# Altium PCB bithd_razor.PcbDoc
Units mm, origin at the board's own origin, x right, y up, seen from the top; angles counter-clockwise.
Board outline 44.54 x 77.25 mm, 2 copper layers (Top Layer, Bottom Layer); 105 components, 76 nets, 389 pads, 138 vias.
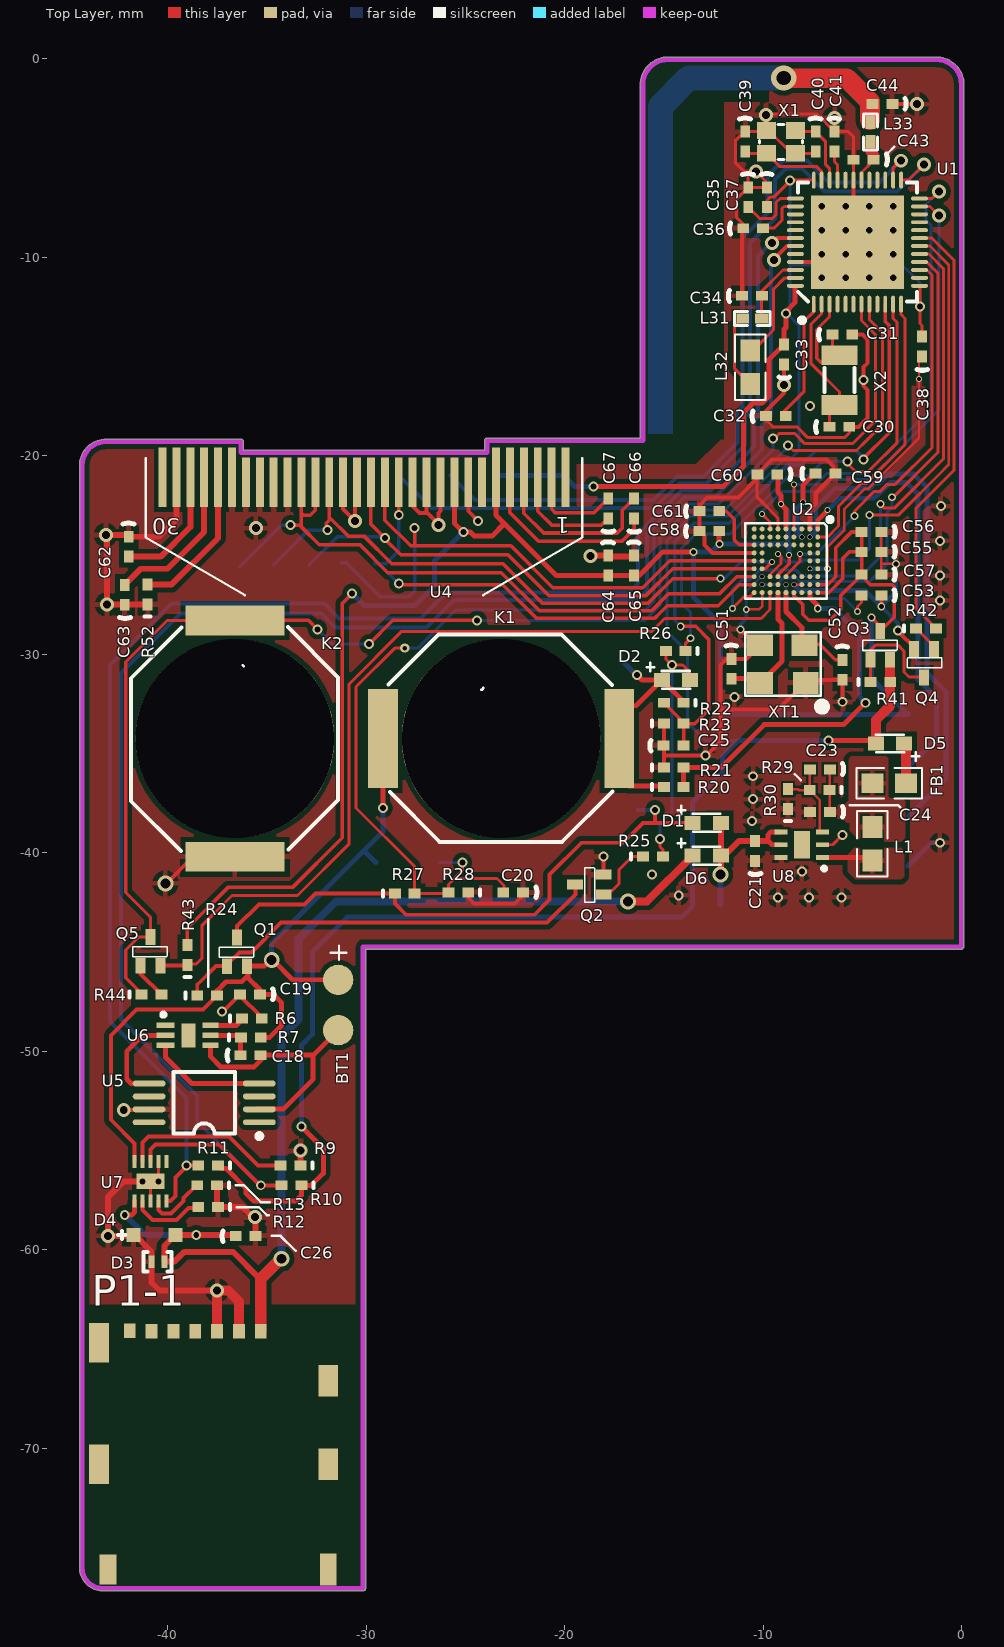
[diagram p0: Top Layer view]
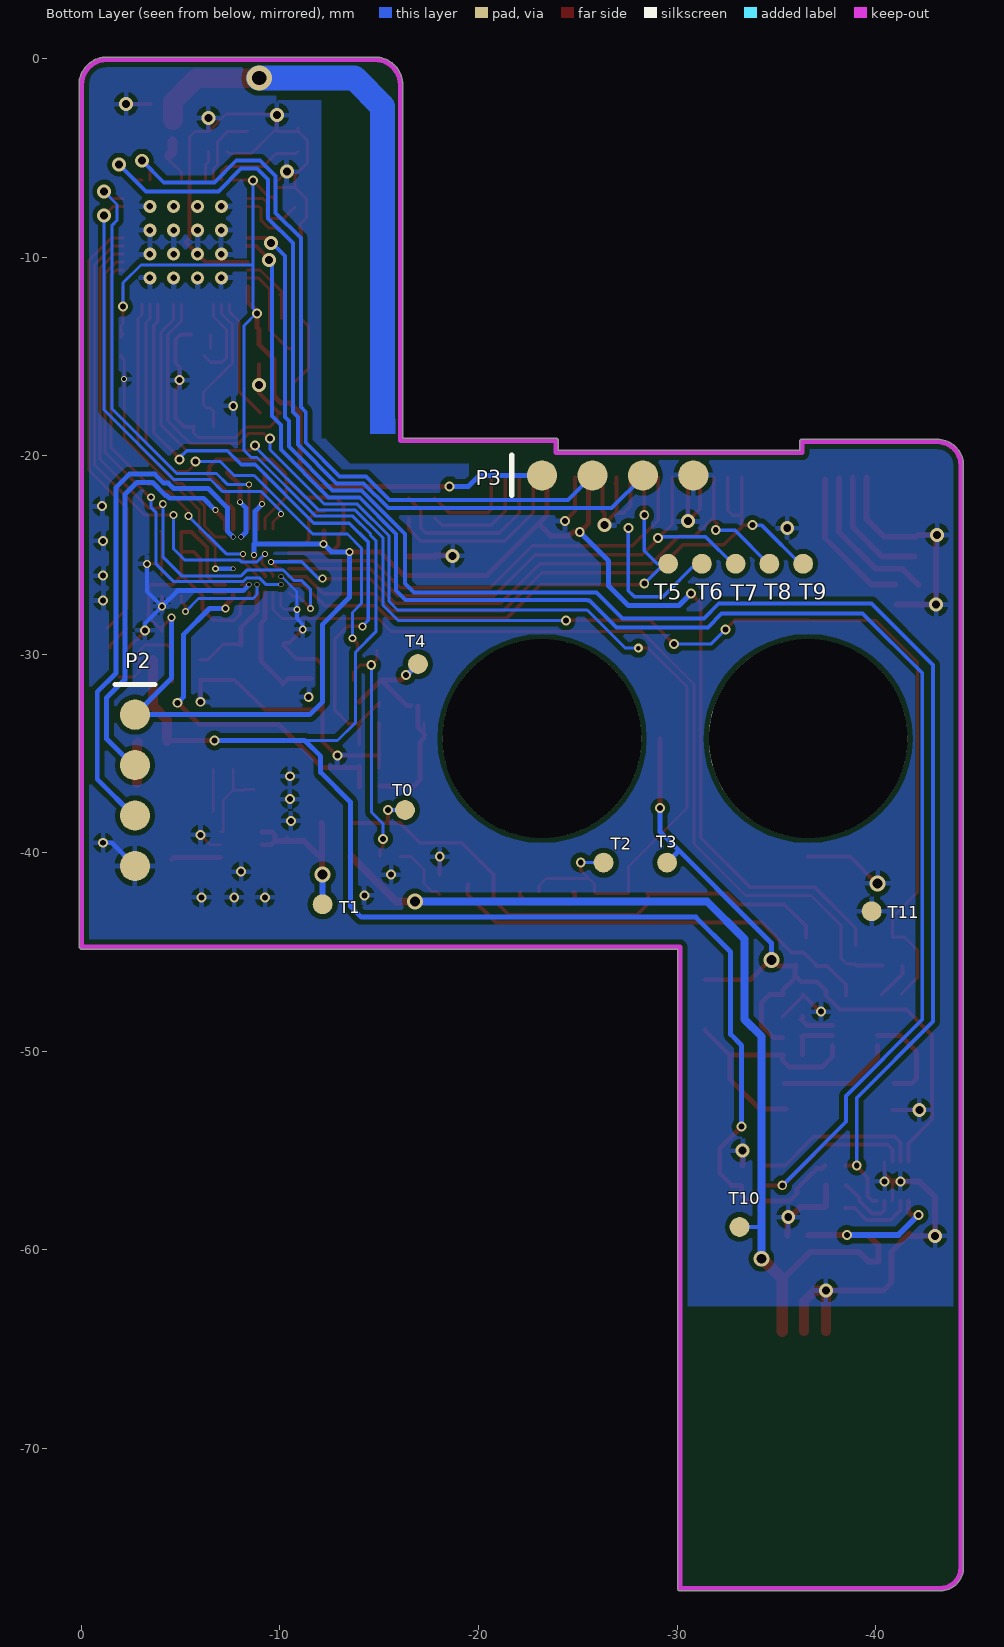
[diagram p1: Bottom Layer view, seen from below]

## Layer stack, top to bottom
Top Layer: signal copper 0.0356
Dielectric: dielectric 0.32, FR-4, Dk 4.8
Bottom Layer: signal copper 0.0356

## Board outline
-44.425,-76 cw(c-44.3,-76) -44.423,-75.975 cw(c-44.3,-75.95) -44.425,-75.95 -44.425,-20.55 cw(c-44.3,-20.55) -44.423,-20.525 cw(c-44.3,-20.5) -44.425,-20.5 cw(c-43.104,-20.5) -43.104,-19.179 -43.031,-19.179 cw(c-43,-19.3) -43,-19.175 -36.3,-19.175 cw(c-36.3,-19.3) -36.175,-19.3 -36.175,-19.725 -24.025,-19.725 -24.025,-19.25 cw(c-23.9,-19.25) -23.9,-19.125 -16.186,-19.125 -16.186,-1.327 cw(c-14.791,-1.327) -14.791,0.068 -1.281,0.068 cw(c-1.281,-1.327) 0.114,-1.327 0.114,-44.711 cw(c-0.011,-44.711) 0.077,-44.8 0.078,-44.8 0.039,-44.839 0.039,-44.838 cw(c-0.05,-44.75) -0.05,-44.875 -30.025,-44.875 -30.025,-77.05 cw(c-30.15,-77.05) -30.025,-77.052 cw(c-30.15,-77.053) -30.025,-77.053 cw(c-30.15,-77.053) -30.15,-77.179 -43.268,-77.179 cw(c-43.268,-77.053) -43.301,-77.174 cw(c-43.25,-76)

## Design rules (kind name [scope] priority, off if disabled: settings)
Clearance [All] p1: gap=0.125
ComponentClearance [All] p1: gap=0.15 collisioncheckmode=3 verticalgap=0.15 showdistances=FALSE
HoleSize [All] p1: absolutevalues=TRUE maxlimit=12 minlimit=0.076 maxpercent=80.000 minpercent=20.000
HoleToHoleClearance [All] p1: gap=0.076 allowstackedmicrovias=TRUE
MinimumSolderMaskSliver [All] p1: minsoldermaskwidth=0.076
PolygonConnect [All] p1: connectstyle=Relief reliefconductorwidth=0.254 reliefentries=4 polygonreliefangle="90 Angle"
RoutingVias [All] p1: holewidth=0.3 width=0.6 viastyle="Through Hole" minholewidth=0.05 minwidth=0.1 maxholewidth=8 maxwidth=9
SilkToSilkClearance [All] p1: silktosilkclearance=0
SilkscreenOverComponentPads [All] p1: minsilkscreentomaskgap=0
SolderMaskExpansion [All] p1: expansion=0.102
Width [All] p1: maxlimit=2.54 minlimit=0.125 preferedwidth=0.25 minimp=50.000000 maximp=50.000000 favimp=50.000000
22 further rules are at their usual default settings.

## Components (designator, comment, footprint, x,y, rotation, side; value= is the part's Value field where it differs from the comment)
BT1 "Battery" BAT_CON -31.4,-46.4 r270 top
C18 "0.1uF" 0402-c -36.7,-50.2 r0 top
C19 "1uF" 0402-c -34.95,-47.15 r180 top
C20 "100nf" 0402-c -21.7,-42 r180 top
C21 "1uF" 0402-c -10.4,-40.8 r90 top
C23 "22pF" 0402-c -6.25,-35.8 r180 top
C24 "10uF" 0402-c -6.25,-37.95 r180 top
C25 "0.1uF" 0402-c -15.4,-34.6 r0 top
C26 "1uF" 0402-c -36.95,-59.3 r0 top
C30 "12pF" 0402-c -7.05,-18.55 r0 top
C31 "12pF" 0402-c -6.9,-13.9 r0 top
C32 "100nF" 0402-c -10.25,-18 r0 top
C33 "100nF" 0402-c -8.95,-15.8 r90 top
C34 "1uF" 0402-c -11.45,-11.95 r0 top
C35 "12pF" 0402-c -10.75,-6.1 r270 top
C36 "12pF" 0402-c -11.389,-8.55 r0 top
C37 "100nF" 0402-c -9.8,-6.1 r270 top
C38 "100nF" 0402-c -2,-15.4 r90 top
C39 "12pF" 0402-c -10.9,-3.3 r270 top
C40 "12pF" 0402-c -7.35,-3.3 r270 top
C41 "100pF" 0402-c -6.4,-3.3 r270 top
C43 "0.8pF" 0402-c -4.05,-5.1 r180 top
C44 "1.2pF" 0402-c -3.1,-2.3 r180 top
C51 "22pF" 0402-c -11.6,-29.85 r270 top
C52 "22pF" 0402-c -6,-29.9 r270 top
C53 "1uf" 0402-c -3.65,-27.05 r180 top
C55 "0.1uf" 0402-c -3.65,-24.85 r180 top
C56 "0.1uf" 0402-c -3.65,-23.85 r180 top
C57 "0.1uf" 0402-c -3.65,-26 r180 top
C58 "0.1uf" 0402-c -13.6,-23.8 r0 top
C59 "2.2uF" 0402-c -7.75,-20.9 r0 top
C60 "0.1uf" 0402-c -8.9,-20.95 r180 top
C61 "2.2uF" 0402-c -13.6,-22.8 r0 top
C62 "2.2uF" 0402-c -41.95,-23.7 r270 top
C63 "4.7uF" 0402-c -42.15,-27.9 r90 top
C64 "1uF" 0402-c -17.8,-24.65 r270 top
C65 "1uF" 0402-c -16.5,-24.65 r270 top
C66 "1uF" 0402-c -16.5,-23.55 r90 top
C67 "1uF" 0402-c -17.8,-23.55 r90 top
D1 "IN5819" SOD523 -13.55,-38.5 r0 top
D2 "IN5819" SOD523 -15.1,-31.3 r0 top
D3 "PESD5V0S1BL" SOD882 -40.8,-60.6 r0 top
D4 "PZU5.6B" SOD323 -39.6,-59.25 r180 top
D5 "IN5819" SOD523 -2.9,-34.5 r180 top
D6 "IN5819" SOD523 -13.55,-40.15 r0 top
FB1 "WLCB1005D" 0603-1 -3.65,-36.5 r0 top
K1 "ON/OFF" SMALL_KEY -23.2,-34.25 r0 top locked
K2 "ON/OFF" SMALL_KEY -36.6,-34.25 r90 top locked
L1 "2.2uH" 0603-1 -4.5,-39.55 r270 top
L31 "15nH" INDC1005X04L -10.55,-13.1 r180 top
L32 "10uH" 0603-1 -10.65,-15.55 r90 top
L33 "3.9nH" INDC1005X04L -4.6,-3.7 r90 top
P1-1 "NanoSim" NANOSIM1 -37.7,-63.7 r0 top
P2 "DownLoad_STM32" SWD_CON -2.7,-33.05 r270 bottom
P3 "DownLoad_Nodic" SWD_CON -23.2,-21 r180 bottom
Q1 "NTA4151PT1G" SOT523_MOSFET -36.5,-44.25 r0 top
Q2 "2SK3019TL" SOT523_MOSFET -19.5,-41.6 r90 top
Q3 "NTA4151PT1G" SOT523_MOSFET -4.1,-28.8 r0 top
Q4 "2SK3019TL" SOT523_MOSFET -1.9,-31.2 r180 top
Q5 "3906" SOT523 -40.85,-44.35 r0 top
R6 "2k" 0402-A -35.75,-48.35 r0 top
R7 "100" 0402-A -35.8,-49.3 r0 top
R9 "10K" 0402-A -33.8,-55.75 r180 top
R10 "10K" 0402-A -33.75,-56.75 r180 top
R11 "10K" 0402-A -37.95,-55.75 r180 top
R12 "18K" 0402-A -37.95,-57.85 r180 top
R13 "3.83K" 0402-A -38,-56.75 r180 top
R20 "2K" 0402-A -14.5,-36.7 r0 top
R21 "2K" 0402-A -14.5,-35.7 r0 top
R22 "2K" 0402-A -14.5,-32.45 r180 top
R23 "10K" 0402-A -14.5,-33.5 r0 top
R24 "1M" 0402-A -38,-47.2 r0 top
R25 "150K" 0402-A -15.55,-40.2 r0 top
R26 "150K" 0402-A -14.4,-29.85 r180 top
R27 "3M" 0402-A -28.05,-42.05 r0 top
R28 "1M" 0402-A -25.35,-42 r180 top
R29 "665K" 0402-A -7.15,-36.85 r180 top
R30 "160K" 0402-A -8.75,-37.3 r90 top
R41 "1M" 0402-A -4.1,-31.4 r0 top
R42 "100K" 0402-A -1.8,-28.7 r0 top
R43 "1M" 0402-A -39,-45.15 r90 top
R44 "10K" 0402-A -40.8,-47.15 r0 top
R52 "390K" 0402-A -41,-27 r90 top
T0 "Test" TEST_P#1 -16.3,-37.85 r0 top
T1 "Test" TEST_P#1 -12.15,-42.6 r0 top
T2 "Test" TEST_P#2 -26.3,-40.45 r0 top
T3 "Test" TEST_P#1 -29.5,-40.5 r0 top
T4 "Test" TEST_P#1 -16.95,-30.5 r0 top
T5 "Test" TEST_P#1 -29.55,-25.45 r0 top
T6 "Test" TEST_P#1 -31.25,-25.45 r0 top
T7 "Test" TEST_P#3 -32.85,-25.45 r0 top
T8 "Test" TEST_P#4 -34.6,-25.55 r0 top
T9 "Test" TEST_P#1 -36.35,-25.45 r0 top
T10 "Test" TEST_P#1 -33.15,-58.85 r90 top
T11 "Test" TEST_P#1 -39.8,-42.95 r90 top
U1 "nRF52832-QFAAB0" QFN40P600X600X90-48N -5.25,-9.25 r90 top
U2 "STM32F205REY6" WLCSP64 -6.85,-23.3 r270 top
U4 "Oled12864" OLED12864_Mod -30.1,-21.25 r180 top
U5 "FS8205A" TSSOP-8 -38.15,-52.6 r180 top
U6 "HY2113" DFN-6L -38.95,-49.2 r270 top
U7 "bq24040" WSON-10 -41.65,-57.25 r90 top
U8 "TPS62260DRV" SON-6 -7,-40.25 r180 top
X1 "32MHz" BT-XTAL_2016 -9.1,-4.2 r180 top
X2 "32.768kHz" XTAL_3215 -6.15,-16.2 r90 top
XT1 "8Mhz" SMD3225 -10.15,-31.45 r0 top

## Footprints (in the part's own frame and the unit in brackets; to place one, negate y for a bottom-side part, rotate by r counter-clockwise, add the part's x,y. Pads: shape width x height; smd on the part's side, far side on the other; paste and mask are expansions set on the pad)
0402-A [mm] "Chip Inductor; Body 1 x 0.5 mm (LxW typ)"
  rect 0.6x0.5 smd: 1(-0.5,0) 2(0.5,0)
  silkscreen extent -1.1,-0.15 -1.1,0.15
0402-c [mm]
  rect 0.6x0.5 smd: 1(0.389,0) 2(1.389,0)
  silkscreen extent -0.3,-0.28 -0.25,0.25
0603-1 [mm] "贴片带丝印"
  rect 1.1x1 smd: 1(-0.85,0) 2(0.85,0)
  silkscreen extent -1.65,-0.76 1.65,0.76, body extent -1.14,-0.38 1.14,0.38, height 1
BAT_CON [mil]
  round 60 smd: 1(0,0) 2(100,0)
  silkscreen extent -67,-15 -39,16
BT-XTAL_2016 [mm] "Crystal 2.0 x 1.6 mm"
  rect 0.95x0.85 smd: 1(-0.725,-0.575) 2(0.725,-0.575) 3(0.725,0.575) 4(-0.725,0.575)
  silkscreen extent -1.08,-0.88 1.08,0.88, body extent -1.05,-0.85 1.05,0.85, height 0.56
DFN-6L [mm]
  rect 0.28x0.9 smd mask+0.05: 1(-0.5,-1.15) 2(0,-1.15) 3(0.5,-1.15)
  rect 0.28x0.8 smd mask+0.05: 4(0.5,1.11) 5(0,1.11)
  rect 0.28x0.81 smd mask+0.05: 6(-0.5,1.11)
  rect 1.2x0.7 smd: ""(0,0)
  silkscreen extent -1.15,-1.36 -0.94,-1.15
INDC1005X04L [mm] "Chip Inductor, 2-Leads, Body 1.0x0.5mm, IPC High Density"
  rect 0.65x0.5 smd: 1(-0.475,0) 2(0.475,0)
  silkscreen extent -0.9,-0.35 0.9,0.35, body extent -0.5,-0.3 0.5,0.3, height 0.5
NANOSIM1 [mm]
  rect 0.6x0.75 smd: 1(2.4,-0.4) 2(1.3,-0.4) 3(0.2,-0.4) 4(-0.9,-0.4) 5(-2,-0.4) 6(-3.1,-0.4) 7(-4.2,-0.375)
  rect 1x2 smd: ""(-5.75,-7.1) ""(-5.75,-0.975)
  rect 0.85x1.5 smd: ""(-5.3,-12.4)
  rect 0.85x1.6 smd: ""(5.8,-12.4)
  rect 1x1.6 smd: ""(5.8,-7.1) ""(5.8,-2.9)
OLED12864_Mod [mm]
  rect 0.4x3 smd: 1(-10.15,-0.15) 2(-9.45,-0.15) 3(-8.75,-0.15) 4(-8.05,-0.15) 5(-7.35,-0.15) 6(-6.65,-0.15) 25(6.65,-0.15) 26(7.35,-0.15) 27(8.05,-0.15) 28(8.75,-0.15) 29(9.45,-0.15) 30(10.15,-0.15)
  rect 0.4x2.5 smd: 7(-5.95,0.1) 8(-5.25,0.1) 9(-4.55,0.1) 10(-3.85,0.1) 11(-3.15,0.1) 12(-2.45,0.1) 13(-1.75,0.1) 14(-1.05,0.1) 15(-0.35,0.1) 16(0.35,0.1) 17(1.05,0.1) 18(1.75,0.1) 19(2.45,0.1) 20(3.15,0.1) 21(3.85,0.1) 22(4.55,0.1) 23(5.25,0.1) 24(5.95,0.1)
  silkscreen extent -11,-1.13 11,5.77
QFN40P600X600X90-48N [mm] "QFN, 48-Leads, Body 6,0x6,0mm (max), Pitch 0,40mm, IPC Medium Density"
  oval 0.85x0.2 smd: 1(-3.125,2.2) 2(-3.125,1.8) 3(-3.125,1.4) 4(-3.125,1) 5(-3.125,0.6) 6(-3.125,0.2) 7(-3.125,-0.2) 8(-3.125,-0.6) 9(-3.125,-1) 10(-3.125,-1.4) 11(-3.125,-1.8) 12(-3.125,-2.2) 25(3.125,-2.2) 26(3.125,-1.8) 27(3.125,-1.4) 28(3.125,-1) 29(3.125,-0.6) 30(3.125,-0.2) 31(3.125,0.2) 32(3.125,0.6) 33(3.125,1) 34(3.125,1.4) 35(3.125,1.8) 36(3.125,2.2)
  oval 0.2x0.85 smd: 13(-2.2,-3.125) 14(-1.8,-3.125) 15(-1.4,-3.125) 16(-1,-3.125) 17(-0.6,-3.125) 18(-0.2,-3.125) 19(0.2,-3.125) 20(0.6,-3.125) 21(1,-3.125) 22(1.4,-3.125) 23(1.8,-3.125) 24(2.2,-3.125) 37(2.2,3.125) 38(1.8,3.125) 39(1.4,3.125) 40(1,3.125) 41(0.6,3.125) 42(0.2,3.125) 43(-0.2,3.125) 44(-0.6,3.125) 45(-1,3.125) 46(-1.4,3.125) 47(-1.8,3.125) 48(-2.2,3.125)
  rect 4.7x4.7 smd: 49(0,0)
  silkscreen extent -4.06,-3 3,3, body extent -3.02,-3.02 3.02,3.02, height 0.86
SMALL_KEY [mm]
  rect 1.5x5 smd: 1(-5.95,0) 2(5.95,0)
  round 10 hole 10 unplated: ""(0,0)
  silkscreen extent -5.67,-5.2 5.61,5.24
SMD3225 [mm]
  rect 1.3x1.1 smd: 1(0,0) 2(2.3,0) 3(2.23,1.9) 4(0,1.9)
  silkscreen extent -0.76,-1.32 3.24,2.54
SOD323 [mm]
  rect 0.7x0.7 smd: 1(2.1,0) 2(0,0)
  silkscreen extent 2.5,-0.2 2.9,0.2
SOD523 [mm]
  rect 0.8x0.7 smd: 1(0,0) 2(1.42,0)
  silkscreen extent -0.76,-0.45 1.42,0.86
SOD882 [mm]
  rect 0.3x0.65 smd: 1(0,0) 2(0.65,0)
  silkscreen extent -0.4,-0.5 1,0.5
SON-6 [mm]
  rect 0.65x0.25 smd: 1(0,0) 2(0,-0.65) 3(0,-1.3) 4(2.1,-1.3) 5(2.1,-0.65) 6(2.1,0)
  rect 0.8x1.4 smd: ""(1.05,-0.65)
  silkscreen extent -0.14,0.48 0,0.62
SOT523 [mm]
  rect 0.5x0.8 smd: 1(-0.5,-1.34) 2(0.5,-1.34) 3(0,0.1)
  silkscreen extent -0.89,-0.89 0.85,-0.38
SOT523_MOSFET [mm]
  rect 0.5x0.8 smd: 1(-0.5,-1.467) 2(0,-0.027) 3(0.5,-1.467)
  silkscreen extent -0.89,-1.02 0.85,-0.51
SWD_CON [mil]
  round 60 smd: 1(0,0) 2(100,0) 3(200,0) 4(300,0)
  silkscreen extent -60,-40 -60,40
TEST_P#1 [mm]
  round 1 smd far side: 1(0,0)
TEST_P#2 [mm]
  round 1 smd far side: 1(0,-0.05)
TEST_P#3 [mm]
  round 1 smd far side: 1(-0.1,0)
TEST_P#4 [mm]
  round 1 smd far side: 1(-0.05,0.1)
TSSOP-8 [mm]
  oval 1.65x0.3 smd: 1(-2.775,0.975) 2(-2.775,0.325) 3(-2.775,-0.325) 4(-2.775,-0.975) 5(2.775,-0.975) 6(2.775,-0.325) 7(2.775,0.325) 8(2.775,0.975)
  silkscreen extent -2.9,-1.55 1.55,1.8
WLCSP64 [mm]
  round 0.25 smd mask+0.02: A1(0.4,-0.4) A2(0.8,-0.4) A3(1.2,-0.4) A4(1.6,-0.4) A5(2,-0.4) A6(2.4,-0.4) A7(2.8,-0.4) A8(3.2,-0.4) A9(3.6,-0.4) B1(0.4,-0.8) B2(0.8,-0.8) B3(1.2,-0.8) B4(1.6,-0.8) B5(2,-0.8) B6(2.4,-0.8) B7(2.8,-0.8) B8(3.2,-0.8) B9(3.6,-0.8) C1(0.4,-1.2) C2(0.8,-1.2) C3(1.2,-1.2) C7(2.8,-1.2) C8(3.2,-1.2) C9(3.6,-1.2) D1(0.4,-1.6) D2(0.8,-1.6) D3(1.2,-1.6) D7(2.8,-1.6) D8(3.2,-1.6) D9(3.6,-1.6) E1(0.4,-2) E2(0.8,-2) E3(1.2,-2) E7(2.8,-2) E8(3.2,-2) E9(3.6,-2) F1(0.4,-2.4) F2(0.8,-2.4) F3(1.2,-2.4) F7(2.8,-2.4) F8(3.2,-2.4) F9(3.6,-2.4) G1(0.4,-2.8) G2(0.8,-2.8) G3(1.2,-2.8) G7(2.8,-2.8) G8(3.2,-2.8) G9(3.6,-2.8) H1(0.4,-3.2) H2(0.8,-3.2) H3(1.2,-3.2) H4(1.6,-3.2) H5(2,-3.2) H6(2.4,-3.2) H7(2.8,-3.2) H8(3.2,-3.2) H9(3.6,-3.2) J1(0.4,-3.6) J2(0.8,-3.6) J3(1.2,-3.6) J4(1.6,-3.6) J5(2,-3.6) J6(2.4,-3.6) J7(2.8,-3.6) J8(3.2,-3.6) J9(3.6,-3.6)
  silkscreen extent -0.19,-4.04 3.9,0.33
WSON-10 [mm]
  rect 0.65x0.2 smd mask+0.05: 1(-0.3,0) 2(-0.3,-0.4) 3(-0.3,-0.8) 4(-0.3,-1.2) 5(-0.3,-1.6) 6(1.7,-1.6) 7(1.7,-1.2) 8(1.7,-0.8) 9(1.7,-0.4) 10(1.7,0)
  rect 0.8x1.4 smd mask+0.05: 11(0.7,-0.8)
  round 0.3 on Top Overlay: ""(-0.4,0.4)
XTAL_3215 [mm] "XTAL SMD 3.2 x 1.5 mm"
  rect 1x1.8 smd: 1(-1.25,0) 2(1.25,0)
  silkscreen extent -0.6,-0.75 0.6,0.75, body extent -1.6,-0.75 1.6,0.75, height 0.81

## Part data
BT1: "备份电池"
C18 C19 C20 C21 C23 C24 C25 C26 C51 C52 C59 C61 C62 C63 C64 C65 C66 C67: library part Cap, "无极性电容"
C30 C31 C35 C36 C39 C40: library part C0402-12p, "Capacitor, NP0, ?%"
C32 C33 C37 C38: library part C0402-100n, "Capacitor, X7R, ?0%"
C34: library part C0603-1?, "Capacitor, X7R, ?0%"
C41: library part C0402-100p, "Capacitor, NP0, ?%"
C43: library part C0402-0.8p, "Capacitor, NP0, ?%"
C44: library part C0402-1.2p, "Capacitor, NP0, ?.1pF"
C53 C55 C56 C57 C58 C60: "Capacitor, X7R, ?0%"
D1 D2 D5 D6: library part D-Schottky, "肖特基二极管"
D3: library part TVS_DIOCODE, "TVS"
D4: library part D-Schottky, "齐纳二极管"
FB1: library part Inductor, "magnetic bead"
K1 K2: library part KEY
L1: library part Inductor, "inductance"
L31: library part L0402-15n, "Inductor, 320mA, ?%"
L32: library part L0603-10?, "Inductor, 80mA, ?0%"
L33: library part L0402-3n9, "Inductor, 170mA, ?.1nH"
P2 P3: library part "Header 4", "Header, 4-Pin"
Q1 Q3: library part MOSFET-P, "P-Channel MOSFET"
Q2 Q4: library part MOSFET-N, "N-Channel MOSFET"
Q5: library part 2N3906, "PNP General Purpose Amplifier"
R6 R7 R9 R10 R11 R12 R13 R20 R21 R22 R23 R24 R25 R26 R27 R28 R29 R30 R41 R42 R43 R44 R52: library part R-10K, "resistor"
T0 T1 T2 T3 T4 T5 T6 T7 T8 T9 T10 T11: library part CHECK, "测试点"
U1: "Multi-protocol Bluetooth Low Energy, ANT and 2.4GHz proprietary system-on-chip"
U5: "Charger IC"
U6: "Charger"
U7: "Charge"
X1: library part XTAL_SMD2016_32MHz_8pF_Epson, "XTAL SMD 2016, 32MHz, Cl=8pF, Tol: ?0ppm, Stab: ?0ppm"
X2: library part "XTAL_FC-135 32.768k", "XTAL SMD 3215, 32.768kHz, 9pF, ?0ppm"
XT1: library part XT, "晶振"

## Via types
v1: diameter 0.5, hole 0.3, Top Layer to Bottom Layer, 58 vias
v2: diameter 0.7, hole 0.4, Top Layer to Bottom Layer, 22 vias
v3: diameter 0.66, hole 0.33, Top Layer to Bottom Layer, 16 vias
v4: diameter 0.4, hole 0.25, Top Layer to Bottom Layer, 14 vias
v5: diameter 0.3, hole 0.2, Top Layer to Bottom Layer, 10 vias
v6: diameter 0.25, hole 0.2, Top Layer to Bottom Layer, 7 vias
v7: diameter 0.8, hole 0.5, Top Layer to Bottom Layer, 5 vias
v8: diameter 0.35, hole 0.2, Top Layer to Bottom Layer, 4 vias
v9: diameter 1.27, hole 0.711, Top Layer to Bottom Layer, 1 vias
v10: diameter 0.457, hole 0.229, Top Layer to Bottom Layer, 1 vias

## Nets (pads, with @x,y where several pads share a name; then routed paths per layer and width w, separated by ;. In a path a pad name is that pad's centre, name@x,y a point inside that pad or via, vN(x,y) a via of type N, cw(c..) or ccw(c..) an arc to the next point about the centre after c; other vN are vias at no path point)
+2.8V: C33.2 C37.2 C38.2 D5.2 P3.1 Q3.3 R10.1 R11.1 R41.2 U1.13 U1.36 U1.48 | length 132
  Top Layer w0.15: C37.2 -9.8,-7.15 -9.639,-6.989 -9.467,-6.989 v1@-8.639,-6.161 ; C33.2@-8.961,-14.411 C33.2 ; C33.2@-8.95,-14.45 C33.2 ; C33.2@-8.95,-14.4 C33.2 ; v1@-8.603,-6.125 U1.36 ; U1.48@-8.375,-11.5 U1.48 ; Q3.3@-3.6,-30.3 Q3.3 Q3.3@-3.6,-30.2 ; C38.2@-2.125,-13.886 C38.2 ; U1.13@-2.1,-11.45 v1(-2.1,-12.5) -2.1,-13.35 -2,-13.45 C38.2 ; C38.2@-2,-14.05 C38.2
  Top Layer w0.25: R11.1 -37.3,-55.9 -37.05,-55.9 -36.05,-56.9 -36.05,-57.15 -35.65,-57.55 -33.55,-57.55 -33.25,-57.25 R10.1 -32.75,-56.75 -32.15,-56.15 -32.15,-54.9 v1(-33.25,-53.8) ; v1(-18.55,-21.55) -12,-21.55 -11,-20.55 -11,-17.85 -10.5,-17.35 -10.05,-17.35 -9.7,-17 -9.7,-15.15 -8.961,-14.411 -8.95,-14.4 -8.95,-13.65 -8.85,-13.55 v1(-8.85,-12.85) -8.85,-12.75 -8.4,-12.3 U1.48@-8.4,-11.5 ; v1(-6.7,-34.35) -4.35,-34.35 -4.32,-34.38 D5.2@-4.3,-34.4
  Top Layer w0.5: D5.2@-4.32,-34.38 -4.32,-33.32 -3.6,-32.6 R41.2 Q3.3@-3.6,-30.3
  Bottom Layer w0.15: -14.55,-24 -14.85,-24.3 -14.85,-28.85 -13.8,-29.9 -13.8,-33.45 -12.9,-34.35 -11.65,-34.35 -11.25,-34.35 ; -14.55,-23.926 -13.674,-23.05 -11.8,-23.05 -8.85,-20.1 -8.55,-20.1 -8.2,-19.75 -8.2,-13.45 v1@-8.825,-12.825 ; v1@-8.85,-12.8 -8.65,-12.6 -8.65,-10.4 ; v1(-8.65,-6.15) -8.65,-10.4 ; v1(-2.1,-12.5) -2.1,-11.3 -3,-10.4 -8.65,-10.4
  Bottom Layer w0.25: v1(-33.25,-53.8) -33.25,-49.7 -32.7,-49.15 -32.7,-45 -30.95,-43.25 -14.1,-43.25 -13.55,-42.7 -13.55,-37.45 -12.05,-35.95 -12.05,-35.15 -11.25,-34.35 v1(-6.7,-34.35) ; P3.1 -20.05,-21 -19.5,-21.55 v1(-18.55,-21.55)
+5V: C26.1 D3.2 D4.2 D6.1 P1-1.1 T10.1 U7.1 | length 58.8
  Top Layer w0.2: D4.2@-39.65,-59.3 D4.2@-39.6,-59.3 ; C26.1@-36.611,-59.25 C26.1
  Top Layer w0.25: v1(-42.15,-58.25) -41.8,-58.25 -41.65,-58.1 U7.1 ; -35.3,-61.4 -35.3,-61.45 -35.25,-61.4
  Top Layer w0.3: C26.1@-36.611,-59.25 D4.2 -39.65,-59.3 -40.15,-59.8 D3.2 -39.65,-60.6 -39.15,-60.1 -36.7,-60.1 -35.4,-61.4 ; -35.3,-61.5 -35.4,-61.4 ; -35.3,-61.4 -35.4,-61.4 ; D6.1@-13.575,-40.225 D6.1@-13.55,-40.2
  Top Layer w0.4: v7(-16.8,-42.45) -15.85,-42.45 D6.1@-13.6,-40.2
  Top Layer w0.6: P1-1.1 -35.3,-61.5 -35.3,-61.45 v7@-34.35,-60.5
  Bottom Layer w0.2: -34.2,-58.85 T10.1
  Bottom Layer w0.3: v1(-42.15,-58.25) -41.15,-59.25 v1(-38.55,-59.25) ; v7@-34.25,-60.55 v7(-34.25,-60.45)
  Bottom Layer w0.4: v7(-34.25,-60.45) -34.25,-49.25 -33.4,-48.4 -33.4,-44.35 -31.5,-42.45 v7@-16.85,-42.45
ADC_VBAT: C20.2 R27.2 R28.2 T2.1 U1.7 | length 59.7
  Top Layer w0.152: v10(-28.05,-29.7) -28.55,-29.7 -30.5,-31.65 -30.5,-37.75 -27.55,-40.7 -27.55,-42 R27.2@-27.5,-42.05 ; R27.2 R27.2@-27.5,-42.05 ; R28.2@-25.9,-42.05 R27.2@-27.5,-42.05 ; R28.2 -25.85,-41.6 -25.55,-41.3 ; v1(-25.15,-40.5) -25.15,-40.9 -25.55,-41.3 ; C20.2@-23.05,-41.95 -23.05,-41.65 -23.4,-41.3 -25.55,-41.3 ; v1(-9.5,-19.15) -9.45,-19.15 -9.2,-18.9 -9.05,-18.9 -9,-18.9 -8.4,-18.9 -7.9,-19.4 -5.5,-19.4 -4.35,-18.25 -4.35,-13.9 -5.05,-13.2 U1.7
  Bottom Layer w0.152: v10(-28.05,-29.7) -27.4,-29.7 -25.474,-27.774 -15.924,-27.774 -15.5,-27.35 -15.5,-24.05 -13.9,-22.45 -12.25,-22.45 -9.5,-19.7 v1(-9.5,-19.15) ; T2.1 v1@-25.2,-40.5
ANT: C44.2 L33.2 | length 28.2
  Top Layer w1: v9@-8.7,-1 -5.79,-1 -4.61,-2.18 L33.2@-4.61,-3.1
  Bottom Layer w1.27: -15.171,-18.255 -15.171,-2.414 -13.747,-0.99 v9@-8.939,-0.99
  other v9: -8.96,-0.98
CHRG_STA: R10.2 U1.43 U7.8 | length 87.4
  Top Layer w0.2: U7.8 -40.85,-54.95 -40.6,-54.7 -37.4,-54.7 -37.05,-55.05 ; -37.15,-54.95 -35.35,-56.75 R10.2 ; v2@-9.6,-10.25 -8.8,-9.45 U1.43@-8.35,-9.45
  Bottom Layer w0.2: v1(-35.3,-56.75) -38.5,-53.55 -38.5,-52.25 -42.35,-48.4 -42.35,-30.95 -39.35,-27.95 -32.25,-27.95 -31.55,-28.65 -26.95,-28.65 -25.6,-27.3 -25.5,-27.3 ; -25.5,-27.279 -16.329,-27.279 -15.85,-26.8 -15.85,-23.954 -13.996,-22.1 -12.45,-22.1 -12.35,-22 -10.05,-19.7 -10.05,-18.45 -9.6,-18 v2@-9.6,-10.25
  other v2: -9.45,-10.15
CTS: U1.15 U2.E7 | length 19.9
  Top Layer w0.15: U2.E7 -8.85,-26.04 -8.15,-25.34 v5(-8.15,-24.95) ; v4(-5.4,-23.05) -5.4,-22.8 -4.4,-21.8 -4.1,-21.8 -3.75,-21.45 -3.35,-21.45 -1.5,-19.6 -1.5,-10.9 -1.75,-10.65 U1.15
  Bottom Layer w0.15: v5(-8.15,-24.95) -7.3,-24.95 v4(-5.4,-23.05)
CTS_NODIC: U1.16 U2.H8 | length 23.9
  Top Layer w0.15: v4(-3.5,-22.1) -3.45,-22.1 -1.202,-19.852 -1.202,-14.55 ; U1.16 -1.761,-10.25 -1.202,-10.809 -1.202,-14.55 ; -1.202,-14.65 -1.202,-14.55
  Bottom Layer w0.15: v6(-10.05,-26.5) -9.31,-26.5 -8.985,-26.175 -8.315,-26.175 -8.14,-26.35 -4.65,-26.35 -3.75,-25.45 -3.75,-22.85 -3.5,-22.6 v4(-3.5,-22.1)
DEC1: C32.2 U1.1 | length 6.1
  Top Layer w0.152: C32.2@-9.011,-17.85 -7.95,-16.789 -7.95,-13.25 -7.45,-12.75 U1.1
DEC3: C41.2 U1.33 | length 1.5
  Top Layer w0.15: C41.2 -6.4,-5.2 -6.25,-5.35 U1.33
DEC4: C34.2 L31.1 U1.46 | length 4.1
  Top Layer w0.15: C34.2@-10.1,-12 -10.1,-11.75 -9,-10.65 U1.46 -8.875,-10.65 ; L31.1 -10.075,-11.975 C34.2@-10.05,-11.95 ; C34.2@-10.05,-11.85 C34.2@-10.011,-11.889
FUN1: U1.24 U2.D1 | length 23.2
  Top Layer w0.15: U2.D1 -8.45,-22.6 v5(-8.45,-21.45) v5@-8.45,-21.4 ; U1.24 -1.5,-7.05 v2(-1.15,-6.7)
  Bottom Layer w0.15: v5(-8.45,-21.45) -7.35,-21.45 -6.8,-20.9 -4.799,-20.9 -1.55,-17.651 -1.55,-8.4 -1.8,-8.15 -1.8,-7.35 v2(-1.15,-6.7)
FUN2: U1.23 U2.G1 | length 23
  Top Layer w0.15: v5(-10.05,-22.95) -9.65,-23.35 U2.G1 ; U1.23 -1.6,-7.45 v2(-1.15,-7.9)
  Bottom Layer w0.15: v5(-10.05,-22.95) -10.05,-22.8 -9.05,-21.8 -7.1,-21.8 -6.5,-21.2 -4.65,-21.2 -1.15,-17.7 v2(-1.15,-7.9)
FUN3: U1.12 U2.A2 | length 14.1
  Top Layer w0.152: U2.A2 -7.15,-24.1 -6.75,-24.1 -6.2,-23.55 -6.2,-22.55 -5.05,-21.4 -4.8,-21.4 -2.85,-19.45 -2.85,-13.1 -3.05,-12.9 U1.12
GND: C19.2 C20.1 C21.1 C24.2 C25.1 C26.2 C30.2 C31.2 C32.1 C33.1 C34.1 C35.1 C36.1 C37.1 C38.1 C39.1 C40.2 C41.1 C43.2 C44.1 C51.1 C52.2 C53.1 C55.1 C56.1 C57.1 C58.1 C59.2 C60.2 C61.1 C62.1 C63.1 C64.1 C65.1 D3.1 D4.1 K2.1 P1-1.2 P1-1.3 P2.4 P3.4 Q2.3 Q4.3 R6.2 R9.1 R12.1 R13.1 R21.1 R23.1 R28.1 R30.1 R52.1 T11.1 U1.31 U1.45 U1.49 U2.B1 U2.B6 U2.C8 U2.D8 U2.F1 U2.H7 U2.H9 U2.J4 U4.8 U4.10 U4.11 U4.12 U4.16 U4.17 U4.21 U4.22 U4.23 U4.24 U4.25 U4.29 U5.7 U7.3 U7.7 U7.11 U8.2 U8.6 X1.2 X1.4 XT1.2 XT1.4 | length 190
  Top Layer w0.125: v8@-10.85,-27.7 v8(-10.85,-27.75) -10.2,-27.75 -10.05,-27.6 U2.H9 ; v6(-8.45,-26.5) U2.C8 ; v8(-6.75,-25.7) -6.75,-24.6 -5.925,-23.775 -5.925,-22.725 -4.864,-21.664 -4.691,-21.664 -2.15,-19.123 v5(-2.15,-16.15) -2.15,-15.15 C38.1@-2,-15 ; C59.2@-6.4,-20.8 C59.2@-6.35,-20.85 ; C59.2@-6.361,-20.911 C59.2 C59.2@-6.361,-20.85 ; C55.1@-4.05,-24.85 C55.1@-4.039,-24.861 ; C57.1 C55.1@-4.039,-24.861 ; -4,-25.45 v4(-3.3,-25.45) ; C56.1@-4,-23.8 -4.039,-23.839 C56.1 C55.1 C55.1@-4.039,-24.861
  Top Layer w0.15: D4.1@-41.7,-59.35 D4.1 ; U7.3 U7.11 -40.45,-56.15 U7.7 ; R12.1@-37.5,-57.8 R12.1 -36.9,-57.85 ; R13.1 R13.1@-37.45,-56.8 ; C36.1 -11,-8.35 -11.35,-8 -11.35,-7.089 C35.1 ; C39.1@-10.9,-3.5 C39.1@-10.9,-3.65 ; C35.1@-10.75,-6.3 C35.1 ; v2(-10.35,-5.7) -9.8,-6.25 C37.1 C35.1 ; C60.2@-10.3,-20.95 -10.3,-21.15 -10.3,-22.1 -9.25,-23.15 U2.F1 ; C32.1 -9.85,-18.011 -9.85,-18.2 -9.5,-18.55 -8.3,-18.55 -7.75,-19.1 -5.9,-19.1 -5.65,-18.85 -5.65,-18.55 C30.2@-5.65,-18.5 ; v2@-9.85,-2.8 -7.289,-2.8 C41.1 ; C40.2 -7.436,-4.775 X1.4 -8.575,-4.775 -9.725,-3.625 X1.2 -9.889,-3.689 C39.1 C39.1@-10.9,-3.65 ; U8.2 -6.5,-39.6 v1(-6,-39.1) ; v2(-6.4,-3) C41.1 ; U1.31 -5.45,-5.211 -5.439,-5.2 -5.439,-3.961 -5.711,-3.689 C41.1 ; C39.1@-10.9,-3.65 -11.4,-4.15 -11.4,-5.25 -10.75,-5.9 C35.1
  Top Layer w0.2: v2(-42.2,-52.95) U5.7@-40.85,-52.95 ; v7@-40.1,-41.6 -38.7,-40.2 K2.1 ; v1@-37.25,-47.95 -37.15,-47.95 C19.2@-36.35,-47.15 ; C19.2 -36.339,-47.211 R6.2@-35.3,-48.25 ; U4.17@-31.15,-21.1 -31.15,-22.7 v2(-30.55,-23.3) -30.55,-21.1 U4.16@-30.45,-21 ; U4.12@-27.65,-21.1 -27.65,-22.55 -27.3,-22.9 -26.9,-22.9 ; U4.11@-26.95,-21.45 U4.11@-26.9,-21.4 ; U4.11@-26.95,-21.1 -26.95,-22.85 -26.9,-22.9 ; U4.10@-26.25,-21.1 -26.25,-22.8 -26.35,-22.9 -26.35,-23.45 -26.9,-22.9 ; U4.8@-24.85,-21.1 -24.85,-22.8 v1(-24.35,-23.3) ; R28.1@-24.75,-42 R28.1 -24.85,-42.25 -24.55,-42.55 -22.5,-42.55 -22.1,-42.15 -22.1,-42.011 C20.1 ; v1@-18.1,-40.2 -18.033,-40.267 Q2.3 -18.033,-40.467 ; R21.1 -15,-35.1 ; R23.1 -15,-35.1 ; C61.1 -13.211,-22.511 -12.8,-22.1 -11.25,-22.1 C60.2@-10.3,-21.15 ; C61.1@-13.2,-22.8 -13.211,-22.811 C58.1 -12.95,-24.061 -12.95,-24.5 -12.55,-24.9 U2.J4 ; v4(-11.15,-28.75) -10.45,-29.45 XT1.4@-10.2,-29.45 ; C34.1 -11.061,-8.611 C36.1 ; C60.2 C60.2@-10.195,-20.855 ; C60.2@-10.2,-20.85 -9.55,-20.2 -6.8,-20.2 -6.45,-20.55 -6.45,-20.8 C59.2@-6.4,-20.85 ; XT1.4 -10.839,-30.239 C51.1 -11.839,-30.239 -12.15,-30.55 -12.15,-32.8 ; C32.1@-10.011,-17.85 -10,-17.85 -9.95,-17.85 -8.95,-16.85 v2@-8.95,-16.5 ; v2@-9.85,-2.8 -9.825,-2.825 X1.2 ; v2@-9,-16.5 v2(-8.95,-16.45) C33.1 ; U1.45 -6.25,-10.25 U1.49 -5.45,-9.05 U1.31 ; XT1.2@-7.9,-31.45 -9.25,-32.8 -12.15,-32.8 ; XT1.2 -7.7,-31.3 C52.2@-6.05,-31.3 ; C52.2 -6,-32.3 v1@-5.95,-32.35 ; C30.2 -5.65,-18.55 -5.2,-18.55 -4.75,-18.1 -4.75,-16.7 -4.95,-16.5 v1(-4.95,-16.2) -4.95,-15.55 -4.75,-15.35 -4.75,-14.15 -5,-13.9 C31.2 ; v4(-4.05,-27.6) C53.1@-4.05,-27.1 ; C44.1 v2(-2.25,-2.3) ; v1@-3.2,-28.85 Q4.3@-2.359,-29.691 ; C38.1@-2.05,-15.061 C38.1 ; -15,-35.1 v1(-12.9,-35.1) -12.85,-35.1 -12.15,-34.4 -12.15,-34.35 -12.15,-32.8
  Top Layer w0.25: P1-1.3@-37.6,-64.05 P1-1.3@-37.55,-64.1 ; U2.B1 -7.65,-22.7 -7.35,-22.4 -7.35,-21.9 -6.361,-20.911 C59.2@-6.35,-20.9
  Top Layer w0.3: v2(-43,-59.3) -43,-57.35 -42.2,-56.55 v1(-41.25,-56.55) U7.11 ; v2@-42.95,-59.3 -41.75,-59.3 D4.1 ; C63.1 -41.061,-27.511 R52.1@-41.05,-27.5 ; C63.1@-42.05,-27.5 v2(-43.05,-27.5) -43.05,-24.05 v2(-43.1,-24) -42.1,-24 C62.1@-42,-24.1 ; C62.1 -40.439,-24.089 -39.55,-23.2 U4.29@-39.55,-21.2 ; D4.1@-41.7,-59.2 -40.8,-60.1 D3.1 -40.8,-61.65 -40.4,-62.05 v2@-37.55,-62.05 ; -39.55,-22.65 U4.29 ; R12.1@-37.5,-57.8 R13.1 ; R12.1 -36.2,-57.85 -35.561,-58.489 C26.2 ; R9.1 v2(-33.3,-55) ; v2@-18.65,-25.05 -18.639,-25.039 C64.1 ; C64.1@-17.85,-25.05 -17.811,-25.089 C65.1@-16.5,-25.089
  Top Layer w0.5: P1-1.3 v2(-37.5,-62.05) -36.95,-62.05 -36.4,-62.6 P1-1.2
  Bottom Layer w0.125: v8@-10.85,-27.7 -10.85,-26.858 -10.092,-26.1 v6(-10.05,-26.1)
  Bottom Layer w0.2: v4(-11.15,-28.75) -11.15,-28.5 -10.85,-28.2 v8(-10.85,-27.75) ; v4(-3.3,-25.45) -3.3,-26.85 v4(-4.05,-27.6) -3.2,-28.45 v1(-3.2,-28.8)
  Bottom Layer w0.25: v6(-8.45,-26.5) -8.15,-26.8 -5.7,-26.8 -4.85,-26.8 v4(-4.05,-27.6) ; v6(-7.65,-25.7) v8(-6.75,-25.7) ; P2.4 -1.53,-39.5 v1(-1.1,-39.5)
  other v1: -40.45,-56.55 -37.25,-48 -9.25,-42.25 -7.7,-42.25 -6.05,-42.25 -14.25,-42.15 -15.6,-41.1 -8.05,-40.95 -18.05,-40.2 -10.55,-38.4 -10.5,-37.3 -10.5,-36.15 -6,-32.4 -11.45,-32.15 -1.1,-27.3 -1.1,-26.05 -1.1,-24.3 -1.05,-22.55 -7.65,-17.5
  other v2: -35.6,-58.35 -18.7,-25.05 -35.55,-23.65 -26.35,-23.5 -9.85,-2.85
  other v3: -7.05,-11.05 -5.85,-11.05 -4.65,-11.05 -3.45,-11.05 -7.05,-9.85 -5.85,-9.85 -4.65,-9.85 -3.45,-9.85 -7.05,-8.65 -5.85,-8.65 -4.65,-8.65 -3.45,-8.65 -7.05,-7.45 -5.85,-7.45 -4.65,-7.45 -3.45,-7.45
  other v7: -40.1,-41.55
KEY1_NODIC: C25.2 R22.2 R23.2 U1.10 | length 33.8
  Top Layer w0.178: R22.2@-15,-32.6 R22.2@-14.9,-32.6 ; R22.2 -14,-33.45 R23.2 ; v4(-14.15,-28.6) -13.4,-28.6 -12.75,-29.25 -12.75,-32.8 -13.45,-33.5 R23.2 ; C25.2@-14,-34.55 R23.2 ; v1@-4.975,-20.175 -3.65,-18.85 -3.65,-13.45 -3.85,-13.25 U1.10
  Bottom Layer w0.178: v4(-14.15,-28.6) -14.45,-28.3 -14.45,-24.35 -13.5,-23.4 -11.7,-23.4 -8.75,-20.45 -8.05,-20.45 -7.35,-19.75 -5.3,-19.75 -4.95,-20.1 v1(-4.95,-20.2)
KEY2_NODIC: K2.2 Q5.3 R44.1 U1.8 | length 71
  Top Layer w0.152: R44.1 -41.3,-47.1 -42.1,-46.3 -42.1,-44.9 -41.45,-44.25 Q5.3 -40.85,-43.25 -42.1,-42 -42.1,-30.4 -40,-28.3 K2.2@-36.65,-28.3 ; v1(-8.75,-19.5) -8.5,-19.75 -5.3,-19.75 -4.8,-19.25 -4,-18.45 -4,-13.8 -4.65,-13.15 U1.8
  Top Layer w0.178: K2.2 -32.9,-28.3 v1(-32.45,-28.75) ; v1(-29.85,-29.5) -28.65,-28.3 v1(-24.4,-28.3)
  Bottom Layer w0.152: v1(-32.45,-28.75) -31.7,-29.5 v1(-29.85,-29.5) ; v1(-24.4,-28.3) -15.95,-28.3 -15.2,-27.55 -15.2,-24.15 -13.8,-22.75 -11.95,-22.75 -8.75,-19.55 v1(-8.75,-19.5)
KEY_CN: R20.2 R21.2 U2.B9 | length 18.7
  Top Layer w0.25: R20.2 R21.2 ; R21.2@-14,-35.65 R21.2 ; U2.B9 -7.65,-27.15 -7.25,-27.55 v4(-7.25,-27.7) ; v1(-4.85,-32.45) -5.95,-33.55 -9.95,-33.55 -12.1,-35.7 R21.2
  Bottom Layer w0.25: v4(-7.25,-27.7) -6.45,-27.7 -5.15,-29 -5.15,-32.15 v1(-4.85,-32.45)
KEY_OK: Q5.2 R43.1 U2.G9 | length 44.7
  Top Layer w0.15: R43.1@-39,-45.6 -38.55,-45.6 -38.25,-45.3 -38.25,-43.65 -36.75,-42.15 -33.45,-42.15 -30.85,-39.55 -30.85,-31.5 -28.2,-28.85 -15.6,-28.85 -15.025,-28.275 ; -15.05,-28.3 -14.95,-28.2 -10.1,-28.2 -9.65,-27.75 U2.G9
  Top Layer w0.2: Q5.2 -39.04,-45.69 R43.1
MCU_EN: R26.1 U1.11 | length 26
  Top Layer w0.152: R26.1 -13.9,-29.45 v4(-13.65,-29.2) ; v1@-5.85,-20.3 -5.35,-20.8 -4.7,-20.8 -4.55,-20.65 -3.25,-19.35 -3.25,-13.3 -3.45,-13.1 U1.11
  Bottom Layer w0.152: v4(-13.65,-29.2) -13.65,-27.9 -14.1,-27.45 -14.1,-24.65 -13.4,-23.95 -11.65,-23.95 -8.7,-21 -7.7,-21 -7,-20.3 v1@-5.85,-20.3
  other v1: -5.75,-20.3
NetBT1_2: BT1.2 C18.2 U5.2 U6.4 | length 12.9
  Top Layer w0.25: U6.4 -37.84,-50.26 -37.3,-50.8 -35.65,-50.8 -35.3,-50.45 C18.2@-35.3,-50.2 ; U5.2@-35.5,-52.9 -34.15,-52.9 -32.66,-51.41 -32.66,-50.2 ; C18.2@-35.35,-50.2 C18.2 C18.2@-35.3,-50.2 ; BT1.2 -32.66,-50.2 ; C18.2@-35.3,-50.2 -32.66,-50.2
NetC18_1: C18.1 R7.1 U6.5 | length 2.5
  Top Layer w0.25: U6.5 -36.4,-49.2 R7.1@-36.311,-49.289 ; C18.1 -36.311,-49.3 R7.1@-36.311,-49.289 ; R7.1 R7.1@-36.311,-49.289 ; R7.1@-36.3,-49.25 -36.311,-49.261 R7.1@-36.311,-49.289
NetC21_2: C21.2 D1.2 D6.2 T1.1 U8.4 U8.5 | length 8.4
  Top Layer w0.25: -9.75,-39.1 -9.75,-39.4 -9.55,-39.6 U8.5 ; -9.711,-39.061 -9.6,-38.95 U8.4
  Top Layer w0.3: v7@-12.13,-40.98 D6.2 ; D1.2@-12.1,-38.5 -12.13,-38.53 D6.2 ; C21.2 -9.761,-39.411 ; C21.2@-10.4,-39.4 -11.2,-39.4 -11.95,-40.15 D6.2
  Bottom Layer w0.3: T1.1 v7(-12.15,-41.1) v7@-12.15,-41.05
NetC23_1: C23.1 C24.1 FB1.1 L1.1 R29.1 | length 2.2
  Top Layer w0.125: C24.1@-6.65,-37.95 -6.65,-35.811 C23.1
NetC23_2: C23.2 R29.2 R30.2 U8.3 | length 4.6
  Top Layer w0.125: R30.2@-8.7,-36.8 -8.25,-36.8 -8.2,-36.85 R29.2 ; C23.2@-7.65,-35.8 R29.2 ; U8.3 -7.15,-38.95 -7.15,-37.35 R29.2
NetC43_1: C43.1 L33.1 U1.30 | length 2
  Top Layer w0.15: U1.30 -5.05,-5.75 -4.5,-5.2 -4.45,-5.2 C43.1@-4.439,-5.2
  Top Layer w0.5: L33.1 -4.6,-4.7 C43.1@-4.4,-4.9
NetC59_1: C59.1 U2.C2 | length 3.7
  Top Layer w0.25: v5(-8,-22.35) -8,-21.5 C59.1@-7.35,-20.85
  Bottom Layer w0.25: v6(-8.05,-24.1) -8.3,-23.85 -8.3,-22.65 v5(-8,-22.35)
NetC61_2: C61.2 U2.J3 | length 3.1
  Top Layer w0.178: C61.2@-12.261,-22.8 -11.85,-22.8 -11.45,-23.2 -11.45,-24.25 -11.2,-24.5 U2.J3
NetC62_2: C62.2 U4.28 | length 6.2
  Top Layer w0.3: C62.2 -40.339,-25.089 -38.85,-23.6 U4.28
NetC63_2: C63.2 U4.27 | length 7.8
  Top Layer w0.3: C63.2 -41.339,-25.7 -40,-25.7 -38.15,-23.85 U4.27@-38.15,-21.15
NetC66_1: C66.1 U4.5 | length 9.4
  Top Layer w0.178: U4.5 -22.75,-22.875 -21.3,-24.325 -17.125,-24.325 -16.5,-23.7 C66.1
NetC66_2: C66.2 U4.4 | length 9
  Top Layer w0.178: U4.4 -22.05,-22.901 -21.051,-23.9 -17.35,-23.9 -17.1,-23.65 -17.1,-22.761 C66.2
NetC67_1: C67.1 U4.3 | length 5.7
  Top Layer w0.178: U4.3 -21.35,-22.8 -20.65,-23.5 -18.15,-23.5 C67.1@-17.828,-23.178 ; C67.1 -17.817,-23.178 C67.1@-17.828,-23.178 ; C67.1@-17.8,-23.15 C67.1@-17.828,-23.178
NetC67_2: C67.2 U4.2 | length 4.8
  Top Layer w0.178: U4.2 -20.65,-22.7 -20.461,-22.889 -18.539,-22.889 C67.2@-17.8,-22.15
NetD1_1: D1.1 Q1.2 R27.1 T0.1 | length 29.2
  Top Layer w0.2: Q1.2 -36.5,-43.7 -35.4,-42.6 -33.1,-42.6 -32.55,-42.05 R27.1 ; R27.1@-28.5,-42.05 R27.1 ; v1(-15.45,-37.85) -15.45,-38.5 ; D1.1 -15.45,-38.5 ; R27.1 -28.55,-42.55 -27.975,-43.125 -21.525,-43.125 -20.75,-42.35 -20.75,-41.1 -19.15,-39.5 -17.05,-39.5 -16.05,-38.5 -15.45,-38.5
  Bottom Layer w0.2: T0.1 v1(-15.45,-37.85) v1@-15.4,-37.8
NetD2_1: D2.1 K1.2 R20.1 R22.1 T4.1 | length 12.6
  Top Layer w0.15: K1.2 -17.25,-34 K1.2@-17.25,-33.45 ; D2.1 D2.1@-15,-31.4
  Top Layer w0.25: K1.2@-17.3,-34.05 -17.25,-34 -16.95,-33.7 K1.2@-16.95,-32.6 ; K1.2 -17.05,-34.45 -17.05,-36.35 -16.75,-36.65 R20.1@-15.05,-36.65 ; K1.2@-16.6,-32.6 -16.4,-32.6 D2.1 ; v1(-16.35,-31.05) -16.1,-31.3 D2.1 ; R22.1@-14,-32.4 D2.1
  Bottom Layer w0.25: T4.1 v1@-16.4,-31.05
NetD2_2: D2.2 R25.2 R26.2 | length 12.2
  Top Layer w0.15: v1@-15.2,-39.35 -15.2,-39.7 -15.05,-39.85 R25.2 ; R26.2@-14.9,-29.8 R26.2 -14.9,-30.25 v1(-14.6,-30.55) ; v1@-14.55,-30.55 -14.05,-30.55 -13.7,-30.9 D2.2@-13.7,-31.3 ; D2.2@-13.75,-31.3 D2.2
  Bottom Layer w0.15: v1(-15.2,-39.3) -15.2,-38.55 -14.6,-37.95 -14.6,-37.9 v1(-14.6,-30.55)
NetD5_1: D5.1 FB1.2 | length 2.1
  Top Layer w0.5: D5.1@-2.85,-34.45 -2.8,-34.5 FB1.2
NetL1_2: L1.2 U8.1 | length 2.5
  Top Layer w0.25: U8.1 -4.65,-40.25 L1.2@-4.55,-40.35
NetL31_2: L31.2 L32.1 | length 3.8
  Top Layer w0.15: L31.2@-11.05,-13.1 -11.45,-13.5 -11.45,-15.6 L32.1
NetL32_2: L32.2 U1.47 | length 5.1
  Top Layer w0.15: L32.2 L32.2@-10.55,-14.6 ; L32.2@-10.65,-14.6 L32.2@-10.55,-14.6 ; U1.47 -8.905,-11.05 -9.475,-11.62 -9.475,-13.675 -10.4,-14.6 L32.2@-10.55,-14.6
NetQ1_1: Q1.1 Q2.2 R24.1 | length 22
  Top Layer w0.2: R24.1 -38.5,-46.65 -37.55,-45.7 Q1.1@-37,-45.7 ; Q1.1 Q1.1@-37,-45.7 ; Q2.2@-19.486,-41.614 Q2.2 ; Q2.2@-19.45,-41.65 -19.45,-42.1 -20.875,-43.525 -34.275,-43.525 -35.767,-45.017 -36.374,-45.017 -37,-45.643 Q1.1@-37,-45.7
NetQ2_1: Q2.1 R25.1 | length 3.2
  Top Layer w0.15: Q2.1 -17.883,-41.95 -17.65,-41.95 -17.25,-41.55 -17.25,-40.85 -16.6,-40.2 R25.1
NetQ3_1: Q3.1 Q4.2 R41.1 | length 5.7
  Top Layer w0.152: R41.1 Q3.1 -4.6,-30.2 -4.6,-29.8 -4.35,-29.55 -3.2,-29.55 -2.9,-29.85 -2.9,-30.9 -2.65,-31.15 Q4.2@-1.9,-31.15
NetQ4_1: Q4.1 R42.1 | length 1.4
  Top Layer w0.152: R42.1 -1.45,-29.55 Q4.1@-1.45,-29.7
NetQ5_1: Q5.1 R44.2 | length 1.9
  Top Layer w0.2: Q5.1@-41.35,-45.7 -41.35,-46.1 R44.2
NetR6_1: R6.1 U6.6 | length 1.8
  Top Layer w0.25: U6.6 -36.55,-48.7 R6.1@-36.25,-48.4 ; R6.1@-36.35,-48.3 R6.1@-36.3,-48.25
NetR9_2: R9.2 U7.9 | length 8.6
  Top Layer w0.2: U7.9 -41.25,-54.6 -40.95,-54.3 -36.9,-54.3 -36.65,-54.55 -36.6,-54.6 -35.45,-55.75 R9.2
NetR12_2: R12.2 U7.2 | length 3.7
  Top Layer w0.2: U7.2 -41.25,-58 -40.75,-58.5 -39.55,-58.5 -38.95,-57.9 R12.2@-38.45,-57.9
NetR13_2: R13.2 U7.4 | length 3.2
  Top Layer w0.2: U7.4 -40.45,-58 -40.274,-58.175 -39.826,-58.175 -39.2,-57.549 -39.2,-57.4 -38.55,-56.75 R13.2
NetR52_2: R52.2 U4.26 | length 7.5
  Top Layer w0.3: R52.2 -39.8,-26.5 -37.45,-24.15 U4.26@-37.45,-21.2
NetU5_4: U5.4 U6.3 | length 5.9
  Top Layer w0.25: U6.3 -40.1,-50.3 -38.775,-51.625 U5.4
NetU5_5: U5.5 U6.2 | length 4.9
  Top Layer w0.25: U5.5 -41.825,-51.625 -42.05,-51.4 -42.05,-50 -41.25,-49.2 U6.2
OLED_CS: T5.1 U2.J8 U4.13 | length 25.8
  Top Layer w0.178: v1@-28.35,-26.5 -23.119,-26.5 -21.435,-28.183 -15.448,-28.183 -15.214,-27.949 -14.832,-27.567 -12.267,-27.567 -11.2,-26.5 U2.J8 ; v1@-28.35,-22.95 U4.13@-28.35,-21.1
  Bottom Layer w0.178: T5.1 T5.1@-29.55,-25.4 ; T5.1@-29.5,-25.45 T5.1@-29.35,-25.45 ; v1(-28.35,-26.45) T5.1@-29.35,-25.45 ; v1(-28.35,-23) -28.35,-24.8 -29,-25.45 T5.1@-29.35,-25.45
OLED_DC: T7.1 U2.J6 U4.15 | length 28.1
  Top Layer w0.178: U4.15@-29.75,-21.1 -29.75,-23.45 v1(-29.05,-24.15) v1@-29,-24.2 ; v1@-29.05,-24.2 -28.25,-25 -22.85,-25 -20.8,-27.05 -15.9,-27.05 -14.55,-25.7 U2.J6
  Bottom Layer w0.178: T7.1@-32.85,-25.5 -31.45,-24.1 v1@-29.05,-24.1
OLED_RST: T6.1 U2.J5 U4.14 | length 31.3
  Top Layer w0.178: U4.14@-29.05,-21.1 -29.05,-23.25 -27.75,-24.55 -27.55,-24.55 ; v1(-27.55,-23.65) -27.55,-24.55 ; U2.J5 -10.453,-25.297 -14.706,-25.297 -16.058,-26.65 -20.6,-26.65 -22.7,-24.55 -27.55,-24.55
  Bottom Layer w0.178: T6.1@-31.25,-25.4 -31,-25.4 -29.3,-27.1 -27.85,-27.1 -27.55,-26.8 v1(-27.55,-23.65) v1@-27.55,-23.6
OSCIN: C52.1 U2.E9 XT1.3 | length 5.3
  Top Layer w0.178: XT1.3@-8.05,-29.55 XT1.3@-7.95,-29.55 ; XT1.3@-7.9,-29.5 -7.15,-29.5 -6.361,-30.289 C52.1
  Top Layer w0.25: U2.E9 -8.85,-27.85 -8.05,-28.65 XT1.3@-8.05,-29.55
OSCOUT: C51.2 U2.F9 XT1.1 | length 6.6
  Top Layer w0.25: C51.2 -10.411,-31.239 XT1.1@-10.15,-31.5 ; XT1.1 -9.05,-30.35 -9.05,-28.45 -9.25,-28.25 U2.F9
P0.25: C35.2 U1.37 | length 3.4
  Top Layer w0.15: C35.2 -10.189,-8.05 -9.528,-8.05 -9.35,-7.872 -9.35,-7.261 -9.139,-7.05 U1.37
P0.26: C36.2 U1.38 | length 2.4
  Top Layer w0.15: C36.2 -9.45,-8.55 -9.05,-8.15 -9.05,-7.55 -8.95,-7.45 U1.38
PG_STA: R11.2 U1.42 U7.5 | length 80.7
  Top Layer w0.2: U7.5 -39.85,-57.55 -39.6,-57.3 -39.6,-56.35 v1@-39.025,-55.775 ; v1@-39,-55.75 R11.2 ; v2@-9.65,-9.4 v2(-9.55,-9.3) -9.3,-9.05 U1.42
  Bottom Layer w0.2: v1(-39.05,-55.75) -39.05,-52.35 -42.9,-48.5 -42.9,-30.55 -39.8,-27.45 -32.1,-27.45 -31.35,-28.2 -27.25,-28.2 -25.95,-26.9 -16.75,-26.9 -16.3,-26.45 -16.3,-24.1 -16.3,-24.05 -16.3,-23.944 -14.106,-21.75 -12.65,-21.75 -10.45,-19.55 -10.45,-18.25 -10.25,-18.05 -10.25,-9.95 v2@-9.65,-9.35
RESET: C53.2 U2.E8 | length 5.3
  Top Layer w0.152: v8(-5.25,-27.85) -5.25,-27.6 -5.05,-27.4 C53.2@-5.05,-27.05
  Bottom Layer w0.152: v6(-8.85,-26.5) -8.85,-26.85 -8.85,-27 -8.651,-27.199 -7.234,-27.199 ; -7.233,-27.2 -5.9,-27.2 v8(-5.25,-27.85)
RXD: U1.18 U2.G7 | length 25.2
  Top Layer w0.15: U2.G7 -9.65,-25.991 -9.1,-25.441 -9.1,-25.1 v5(-9.25,-24.95) ; v4(-4.65,-23) -3.193,-23 -0.896,-20.704 ; U1.18 -1.6,-9.45 -0.652,-10.398 -0.652,-20.452 -0.9,-20.7
  Bottom Layer w0.15: v5@-9.245,-24.95 v5(-9.25,-24.95) -8.85,-25.35 -8.055,-25.35 -7.955,-25.25 -5.2,-25.25 -4.65,-24.7 v4(-4.65,-23)
RXD_NODIC: U1.17 U2.J9 | length 28.9
  Top Layer w0.15: v8(-11.55,-27.7) -10.95,-27.1 -10.65,-27.1 U2.J9 ; v4@-4,-22.45 v4(-4.1,-22.45) -3.9,-22.65 -3.4,-22.65 -0.927,-20.177 -0.927,-10.573 -1.65,-9.85 U1.17
  Bottom Layer w0.15: v8(-11.55,-27.7) -11.55,-26.75 -11.1,-26.3 -10.71,-26.3 -10.185,-25.775 -8.326,-25.775 -8.026,-26.075 -5.075,-26.075 -4.1,-25.1 v4(-4.1,-22.45)
SPI_CLK: T8.1 U2.H6 U4.18 | length 31.6
  Top Layer w0.178: v1@-32,-23.7 -32,-23.4 -31.85,-23.25 -31.85,-23.1 ; U4.18@-31.85,-21.1 -31.85,-23.1 ; -14.55,-26.2 -15.778,-27.428 -21.122,-27.428 -23.1,-25.45 -28.7,-25.45 -30.075,-24.075 -30.875,-24.075 -31.85,-23.1 ; -14.5,-26.2 v4(-12.15,-26.2) ; U2.H6 -9.9,-25.7 v5(-9.55,-25.35)
  Bottom Layer w0.178: T8.1@-34.65,-25.5 -32.9,-23.75 v1(-31.95,-23.75) ; v4(-12.15,-26.2) -11.95,-26.2 -11.3,-25.55 -11.1,-25.35 v5(-9.55,-25.35)
SPI_DIN: T9.1 U2.J7 U4.19 U4.20 | length 34.4
  Top Layer w0.178: v1(-33.8,-23.5) -33.3,-23.5 -33.25,-23.55 ; U4.20@-33.25,-21.1 -33.25,-22.9 ; U4.19@-32.55,-21.1 -32.55,-22.75 -32.8,-23 -33.15,-23 -33.25,-22.9 ; -31.05,-24.5 -30.95,-24.5 ; -15.64,-27.806 -21.279,-27.806 -23.184,-25.9 -28.9,-25.9 -30.3,-24.5 -30.95,-24.5 ; -15.6,-27.8 -14.75,-26.95 -12.184,-26.95 -11.334,-26.1 -11.05,-26.1 ; -11.2,-26.1 -11.05,-26.1 ; U2.J7 -11.05,-26.1 ; -33.25,-23.55 -33.25,-23.6 -32.35,-24.5 -30.95,-24.5 ; -33.25,-23.55 -33.25,-22.9
  Bottom Layer w0.178: T9.1@-36.35,-25.6 -34.25,-23.5 v1(-33.8,-23.5)
STM_POWCTL: R42.2 U1.19 | length 22
  Top Layer w0.15: U1.19 -1.5,-9.05 -0.5,-10.05 -0.377,-10.173 -0.377,-20.727 -2.3,-22.65 -2.3,-27.7 R42.2
SWCLK: P2.2 U2.A1 | length 21.2
  Top Layer w0.25: U2.A1 -7.25,-23.25 v5(-6.75,-22.75)
  Bottom Layer w0.25: v5(-6.75,-22.75) -6.15,-22.15 -4.436,-22.15 -4.286,-22 -4.232,-22 -3.582,-21.35 -2.8,-21.35 -2.2,-21.95 -2.2,-31.269 ; P2.2@-2.6,-35.6 -1.269,-34.269 -1.269,-32.2 -2.2,-31.269 ; -2.2,-31.3 -2.2,-31.269
SWDCLK_NORDIC: P3.3 U1.25 | length 43.6
  Top Layer w0.15: U1.25 -2.675,-6.125 v2(-1.9,-5.35)
  Bottom Layer w0.15: P3.3 P3.3@-28.265,-21.015
  Bottom Layer w0.2: P3.3@-28.3,-21.05 -26.7,-22.65 -15.466,-22.65 -14.216,-21.4 -12.85,-21.4 -10.9,-19.45 -10.9,-18.05 -10.65,-17.8 -10.65,-9.3 -9.4,-8.05 -9.4,-6.1 -8.85,-5.55 -8.05,-5.55 -6.9,-6.7 -3.25,-6.7 v2(-1.9,-5.35)
SWDIO: P2.3 U2.B2 | length 25.9
  Bottom Layer w0.25: v6(-7.65,-24.1) -7.35,-23.8 -7.35,-22.65 -7.35,-22.625 -6.992,-22.267 -6.837,-22.112 -6.375,-21.65 -4.65,-21.65 ; -4.645,-21.655 -4.378,-21.388 -4.15,-21.388 -3.7,-20.938 -2.412,-20.938 -1.75,-21.6 -1.75,-30.95 -0.8,-31.9 -0.8,-36.3 P2.3@-2.65,-38.15
SWDIO_NORDIC: P3.2 U1.26 | length 39.4
  Top Layer w0.15: U1.26 -3.45,-5.5 v2@-3.05,-5.1
  Bottom Layer w0.2: P3.2 -24.5,-22.24 -15.515,-22.24 -14.325,-21.05 -13,-21.05 -11.3,-19.35 -11.3,-17.8 -11.05,-17.55 -11.05,-9.05 -9.775,-7.775 -9.775,-5.925 -9,-5.15 -7.8,-5.15 -6.7,-6.25 -4.15,-6.25 v2(-3.05,-5.15)
VBAT: BT1.1 C19.1 K1.1 Q1.3 R7.2 R24.2 T3.1 U7.10 | length 39.9
  Top Layer w0.2: U7.10 -41.65,-54.65 -42.85,-53.45 -42.85,-49.2 -41.55,-47.9 -38.2,-47.9 R24.2
  Top Layer w0.25: R24.2 -37.5,-46.95 -37.05,-46.5 -36.25,-46.5 -36,-46.25 ; Q1.3@-36,-45.75 Q1.3 Q1.3@-36,-45.7 ; Q1.3@-36,-45.65 Q1.3@-36,-45.7 ; Q1.3@-35.95,-45.75 -35.95,-46.3 -35.339,-46.911 C19.1 ; R7.2 -34.85,-49.3 -34.55,-49 -34.25,-48.7 -34.25,-47.55 -34.65,-47.15 C19.1@-35.3,-47.15 ; v7@-34.75,-45.35 -34.725,-45.375 v7@-34.7,-45.4 ; BT1.1 -33.7,-46.4 v7@-34.7,-45.4 ; v1@-29.15,-37.7 K1.1 ; Q1.3@-36,-45.7 -35.1,-45.7 -34.8,-45.4 v7(-34.75,-45.4) v7@-34.7,-45.4
  Bottom Layer w0.25: v7(-34.75,-45.4) -34.75,-44.55 -29.15,-38.95 v1(-29.15,-37.75) ; -30.05,-39.95 T3.1
VCC33_STM32: C55.2 C56.2 C57.2 C58.2 C60.1 C64.2 C65.2 P2.1 Q3.2 R43.2 U2.A8 U2.A9 U2.D9 U2.E1 U2.F7 U4.6 U4.9 | length 107.4
  Top Layer w0.178: R43.2 -39,-43.8 -36.95,-41.75 -33.7,-41.75 -31.2,-39.25 -31.2,-27.45 v1(-30.7,-26.95) ; U4.9@-25.55,-21.65 U4.9@-25.55,-21.1 ; U4.6@-23.45,-21.15 U4.6 ; C64.2@-17.85,-26 -17.811,-26.039 C64.2 C64.2@-17.789,-26.039 ; C65.2@-16.475,-26.064 C65.2@-16.461,-26.05 ; U2.F7 -9.25,-26 -8.691,-25.441 v5@-8.691,-25.009 ; U2.D9 -8.45,-27.05 -8,-27.5 -8,-28 -7.7,-28.3 -6.65,-28.3 -6.1,-27.75 -6.1,-27.061 C57.2 ; U2.A9 -6.7,-26.9 -6,-26.2 -6,-25.2 -5.65,-24.85 C55.2 ; U2.A8 -6.75,-26.5 -6.35,-26.1 -6.35,-24.65 -5.55,-23.85 -5.05,-23.85 C56.2 C55.2 ; C57.2@-5.069,-25.969 C57.2@-5.05,-25.95 ; C57.2@-5.039,-26.139 C57.2@-5.039,-26.061 ; v4(-4.55,-28.15) -4.05,-28.65 Q3.2@-4.05,-28.8 ; Q3.2@-4.05,-28.85 Q3.2@-4.05,-28.8 ; C57.2@-5.039,-26.061 C57.2 ; C57.2@-5.039,-26.061 -4.6,-26.5 -3.5,-26.5 -3.4,-26.6 -3.4,-28.15 Q3.2@-4.05,-28.8 ; C57.2 C55.2
  Top Layer w0.25: U4.9@-25.55,-21.65 -25.55,-23.4 v1(-25.1,-23.85) -24.75,-23.85 -24.55,-24.05 -23.65,-24.05 -23.05,-23.45 ; U4.6@-23.45,-21.15 -23.45,-23 -23.05,-23.4 ; -23.075,-23.425 -23.05,-23.4 ; C64.2@-17.811,-26.039 -20.411,-26.039 -23.05,-23.4 ; C64.2@-17.8,-26.05 -17.789,-26.039 C65.2 ; C65.2@-16.5,-26.05 -16.461,-26.05 -16.25,-26.05 -15.05,-24.85 v4(-13.5,-24.85) ; v4@-12.211,-24.439 C58.2 ; C60.1@-9.25,-20.95 -9.25,-21.85 -9.1,-22 v5(-9.1,-22.45) -8.85,-22.7 U2.E1
  Bottom Layer w0.178: v4@-4.5,-28.15 v4@-4.475,-28.175
  Bottom Layer w0.25: v1(-30.7,-26.95) -30.1,-27.55 -27.55,-27.55 -26.55,-26.55 -26.55,-25.3 v1(-25.1,-23.85) ; v5(-9.1,-22.45) -8.75,-22.8 -8.75,-24.4 -8.7,-24.45 ; v5(-8.7,-25) -8.7,-24.45 ; v4(-4.55,-28.15) -4.55,-31.2 P2.1@-2.75,-33 ; P2.1@-2.7,-33 P2.1@-2.75,-33 ; -8.7,-24.45 v4(-12.2,-24.45) -12.6,-24.85 v4(-13.5,-24.85) -13.5,-27.15 -12.15,-28.5 -12.15,-32.4 -11.5,-33.05 P2.1 P2.1@-2.75,-33
XC1: C40.1 U1.34 X1.1 | length 3.8
  Top Layer w0.15: X1.1 -8.311,-3.689 C40.1 -6.85,-4.189 -6.85,-5.35 -6.65,-5.55 U1.34
XC2: C39.2 U1.35 X1.3 | length 4.7
  Top Layer w0.15: C39.2 -10.814,-4.775 X1.3 -9.15,-5.45 -7.3,-5.45 -7.05,-5.7 U1.35
XL1: C30.1 U1.2 X2.1 | length 7.3
  Top Layer w0.152: U1.2 -7.05,-12.85 -7.6,-13.4 -7.6,-15.35 -6.15,-16.8 X2.1 -6.3,-17.6 -6.5,-17.6 -6.661,-17.761 C30.1
XL2: C31.1 U1.3 X2.2 | length 5.1
  Top Layer w0.152: U1.3 -6.65,-13 -7.3,-13.65 -7.3,-15.05 -7.3,-15.1 -7.1,-15.3 -6.5,-15.3 X2.2 ; X2.2@-6.511,-14.589 C31.1
pads on no net: K1. K2. P1-1. P1-1.4 P1-1.5 P1-1.6 P1-1.7 U1.4 U1.5 U1.6 U1.9 U1.14 U1.20 U1.21 U1.22 U1.27 U1.28 U1.29 U1.32 U1.39 U1.40 U1.41 U1.44 U2.A3 U2.A4 U2.A5 U2.A6 U2.A7 U2.B3 U2.B4 U2.B5 U2.B7 U2.B8 U2.C1 U2.C3 U2.C7 U2.C9 U2.D2 U2.D3 U2.D7 U2.E2 U2.E3 U2.F2 U2.F3 U2.F8 U2.G2 U2.G3 U2.G8 U2.H1 U2.H2 U2.H3 U2.H4 U2.H5 U2.J1 U2.J2 U4.1 U4.7 U4.30 U5.1 U5.3 U5.6 U5.8 U6. U6.1 U7. U7.6 U8.

## Polygon pours and split planes (outlines as drawn)
GND on Top Layer "Top Layer-No Net" (solid, remove dead copper, pour order 1000): 1.798,-21.038 -17.844,-21.038 -17.844,-19.538 -43.514,-19.538 -44.034,-20.038 -44.242,-20.238 -44.242,-21.488 -44.242,-62.738 -30.523,-62.738 -30.523,-44.988 1.798,-44.988 1.798,-21.088 1.85,-21.038
NetL1_2 on Top Layer "Top Layer-No Net" (solid, pour order 1000): -5.75,-40.1 -5.4,-39.75 -3.3,-39.75 -3.05,-39.75 -2.9,-39.9 -2.9,-41.2 -3.05,-41.35 -5.3,-41.35 -5.35,-41.35 -5.75,-40.95 -5.75,-40.1
NetC23_1 on Top Layer "Top Layer-No Net" (solid, pour order 1001): -6.95,-37.6 -6.95,-38.25 -6.9,-38.3 -6.25,-38.3 -6,-38.3 -5.9,-38.4 -5.8,-38.5 -5.65,-38.5 -5.65,-38.75 -5.65,-38.85 -5.65,-38.9 -5.1,-39.45 -4.25,-39.45 -3.05,-39.45 -2.9,-39.3 -2.85,-39.25 -2.85,-37.5 -2.85,-37.4 -3,-37.25 -3.4,-37.25 -3.6,-37.25 -3.7,-37.15 -3.7,-36.1 -3.7,-35.25 -3.8,-35.15 -5.15,-35.15 -5.55,-35.15 -5.6,-35.2 -5.7,-35.3 -5.7,-37.25 -5.7,-37.35 -5.9,-37.55 -6.85,-37.55 -6.9,-37.55 -6.95,-37.6
GND on Top Layer "Top Layer-No Net" (solid, pour order 1002): -10.9,-40.156 -8.75,-40.156 -8.75,-38.905 -8.8,-38.853 -9.6,-38.02 -9.6,-37.134 -9.6,-35.102 -9.55,-35.05 -6.65,-35.05 -6.2,-35.05 -6.1,-35.154 -6.1,-36.978 -6.1,-37.082 -6.15,-37.134 -6.2,-37.082 -7.3,-37.082 -7.3,-41.25 -10.9,-41.25 -10.9,-40.156
GND on Top Layer "Top Layer-No Net" (solid, remove dead copper, pour order 1000): -9.697,0.003 -9.697,-2.197 -11.947,-2.197 -11.947,-19.197 -12.147,-19.197 -12.247,-19.297 -13.397,-20.447 -14.547,-20.447 -19.397,-20.447 -19.397,-22.447 -19.397,-22.647 -19.347,-22.697 0.103,-22.697 0.103,-0.897 -0.047,-0.747 -0.747,-0.047 -0.897,-0.047 -9.647,-0.047 -9.747,0.053
GND on Bottom Layer "Top Layer-No Net" (solid, remove dead copper, pour order 1003): 1.798,-21.149 -17.833,-21.149 -17.833,-19.649 -43.489,-19.649 -44.008,-20.149 -44.216,-20.349 -44.216,-21.599 -44.216,-62.849 -30.505,-62.849 -30.505,-45.099 1.798,-45.099 1.798,-21.199 1.85,-21.149
GND on Bottom Layer "Top Layer-No Net" (solid, pour order 1002): -9.81,0.318 -9.81,-2.117 -12.081,-2.117 -12.081,-19.161 -12.334,-19.161 -12.334,-19.21 -13.545,-20.403 -19.5,-20.403 -19.5,-22.192 -19.096,-22.589 -0.222,-22.589 -0.222,-0.924 -0.272,-0.874 -0.272,-0.725 -0.272,-0.377 -0.676,0.02 -0.979,0.318 -1.786,0.318 -9.81,0.318

## Keep-outs
Keep-Out Layer:
  lines w0.25: -44.3,-76 ccw(c-43.25,-76) -43.25,-77.05 ; -44.3,-75.95 -44.3,-20.55 ; -44.3,-20.5 cw(c-43.104,-20.5) -43.104,-19.304 -42.981,-19.304 ; -43.268,-77.053 -30.15,-77.053 ; -43,-19.3 -36.3,-19.3 -36.3,-19.85 -23.9,-19.85 -23.9,-19.25 -16.061,-19.25 -16.061,-1.327 cw(c-14.791,-1.327) -14.791,-0.057 -13.311,-0.057 ; -30.15,-77.05 -30.15,-44.75 -0.05,-44.75 -0.011,-44.711 -0.011,-1.327 ccw(c-1.281,-1.327) -1.281,-0.057 ; -13.321,-0.057 -1.281,-0.057 ; -1.5,-0.057 -1.281,-0.057

## Other copper
Bottom Layer:
  region net ANT: -14.539,-18.141 -15.809,-18.141 -15.809,-18.903 -14.539,-18.903

## Silkscreen, mask and mechanical layers (free items; w line width, h text height)
Top Overlay:
  lines w0.125: -37.95,-46.75 -37.95,-43.35 ; -36.55,-56.75 -36.15,-56.75 -35.3,-57.6 -34.85,-57.6 ; -36.5,-57.85 -35.4,-57.85 -35,-58.25 -34.9,-58.25 ; -36.2,-30.55 ccw(c-36.15,-30.55) -36.15,-30.6 ; -34.75,-59.3 -34.3,-59.3 -33.55,-60.05 ; -24.2,-31.8 ccw(c-24.2,-31.7) -24.1,-31.7 ; -8.4,-36.05 -8.1,-36.35 ; -5.65,-37.6 -3.2,-37.6 -3.1,-37.7 ; -3.7,-4.75 -3.4,-4.45

## Text inside footprints (layer, text, board x,y; h text height)
U4: Top Overlay "30" at -39.35,-23.16 h0.8 r180; Top Overlay "1" at -19.75,-23.1 h0.8 r180